# Altium PCB Main.PcbDoc (part 2 of 2)
Units mil, origin at the board's own origin, x right, y up, seen from the top; angles counter-clockwise.
Board outline 1000 x 1000 mil, 4 copper layers (Top Layer, VCC, GND, Bottom Layer), stack 62.669 mil thick; 79 components, 78 nets, 304 pads, 168 vias.
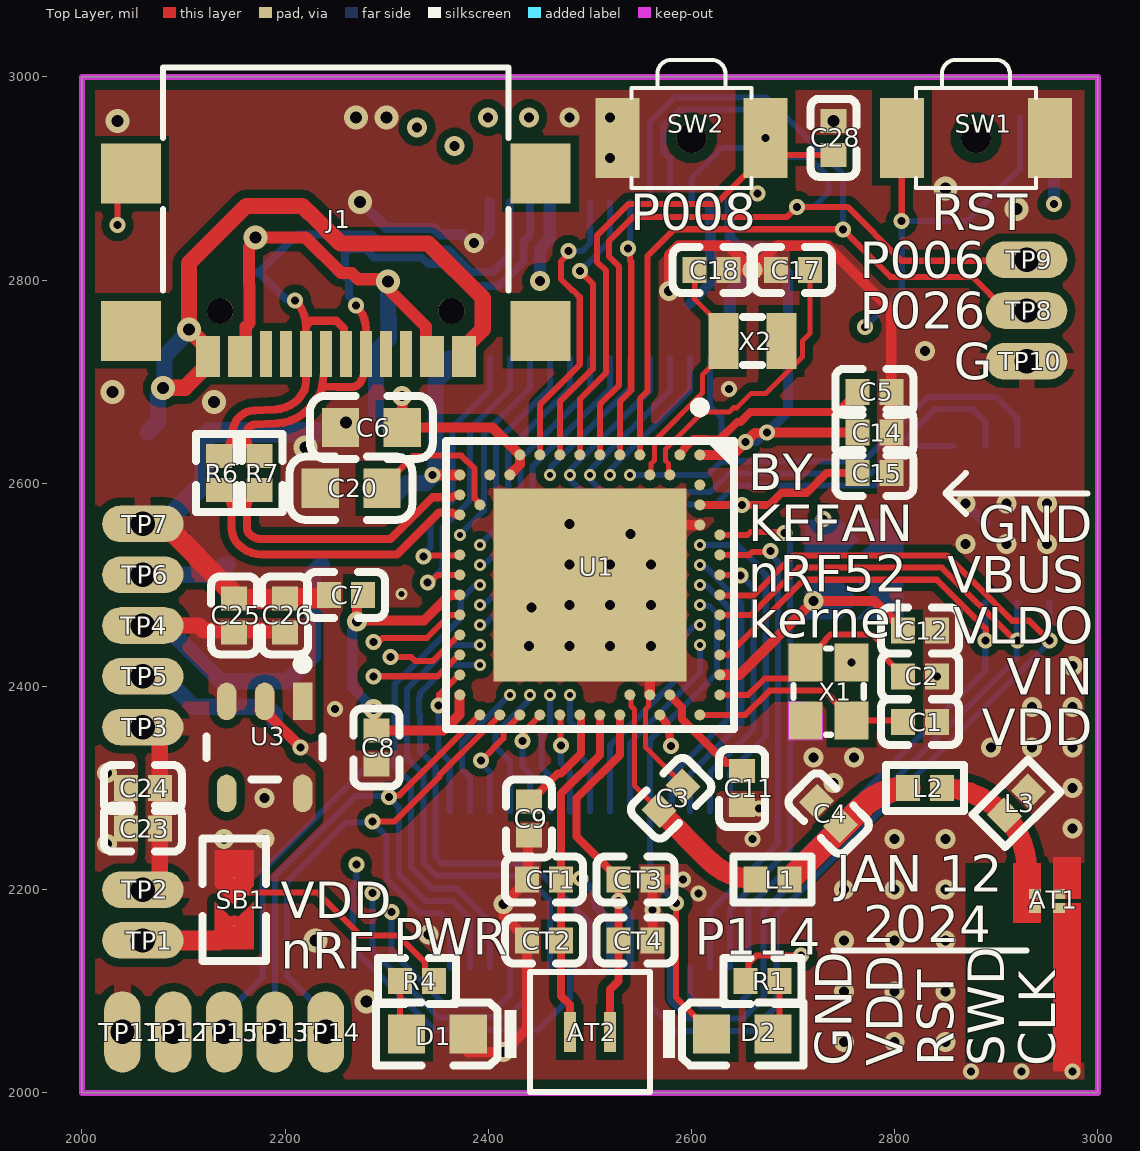
[diagram p0: Top Layer view]

## Silkscreen, mask and mechanical layers (free items; w line width, h text height) (continued)
Board Shape: (continued)
  the board outline again, w6